# Altium PCB CoreV1.1_test.PcbDoc (part 14 of 14)
Units mil, origin at the board's own origin, x right, y up, seen from the top; angles counter-clockwise.
Board outline 2860 x 2420 mil, 6 copper layers (Top Layer, GND, SIGNAL_1, SIGNAL_2, POWER, Bottom Layer); 110 components, 241 nets, 882 pads, 697 vias.
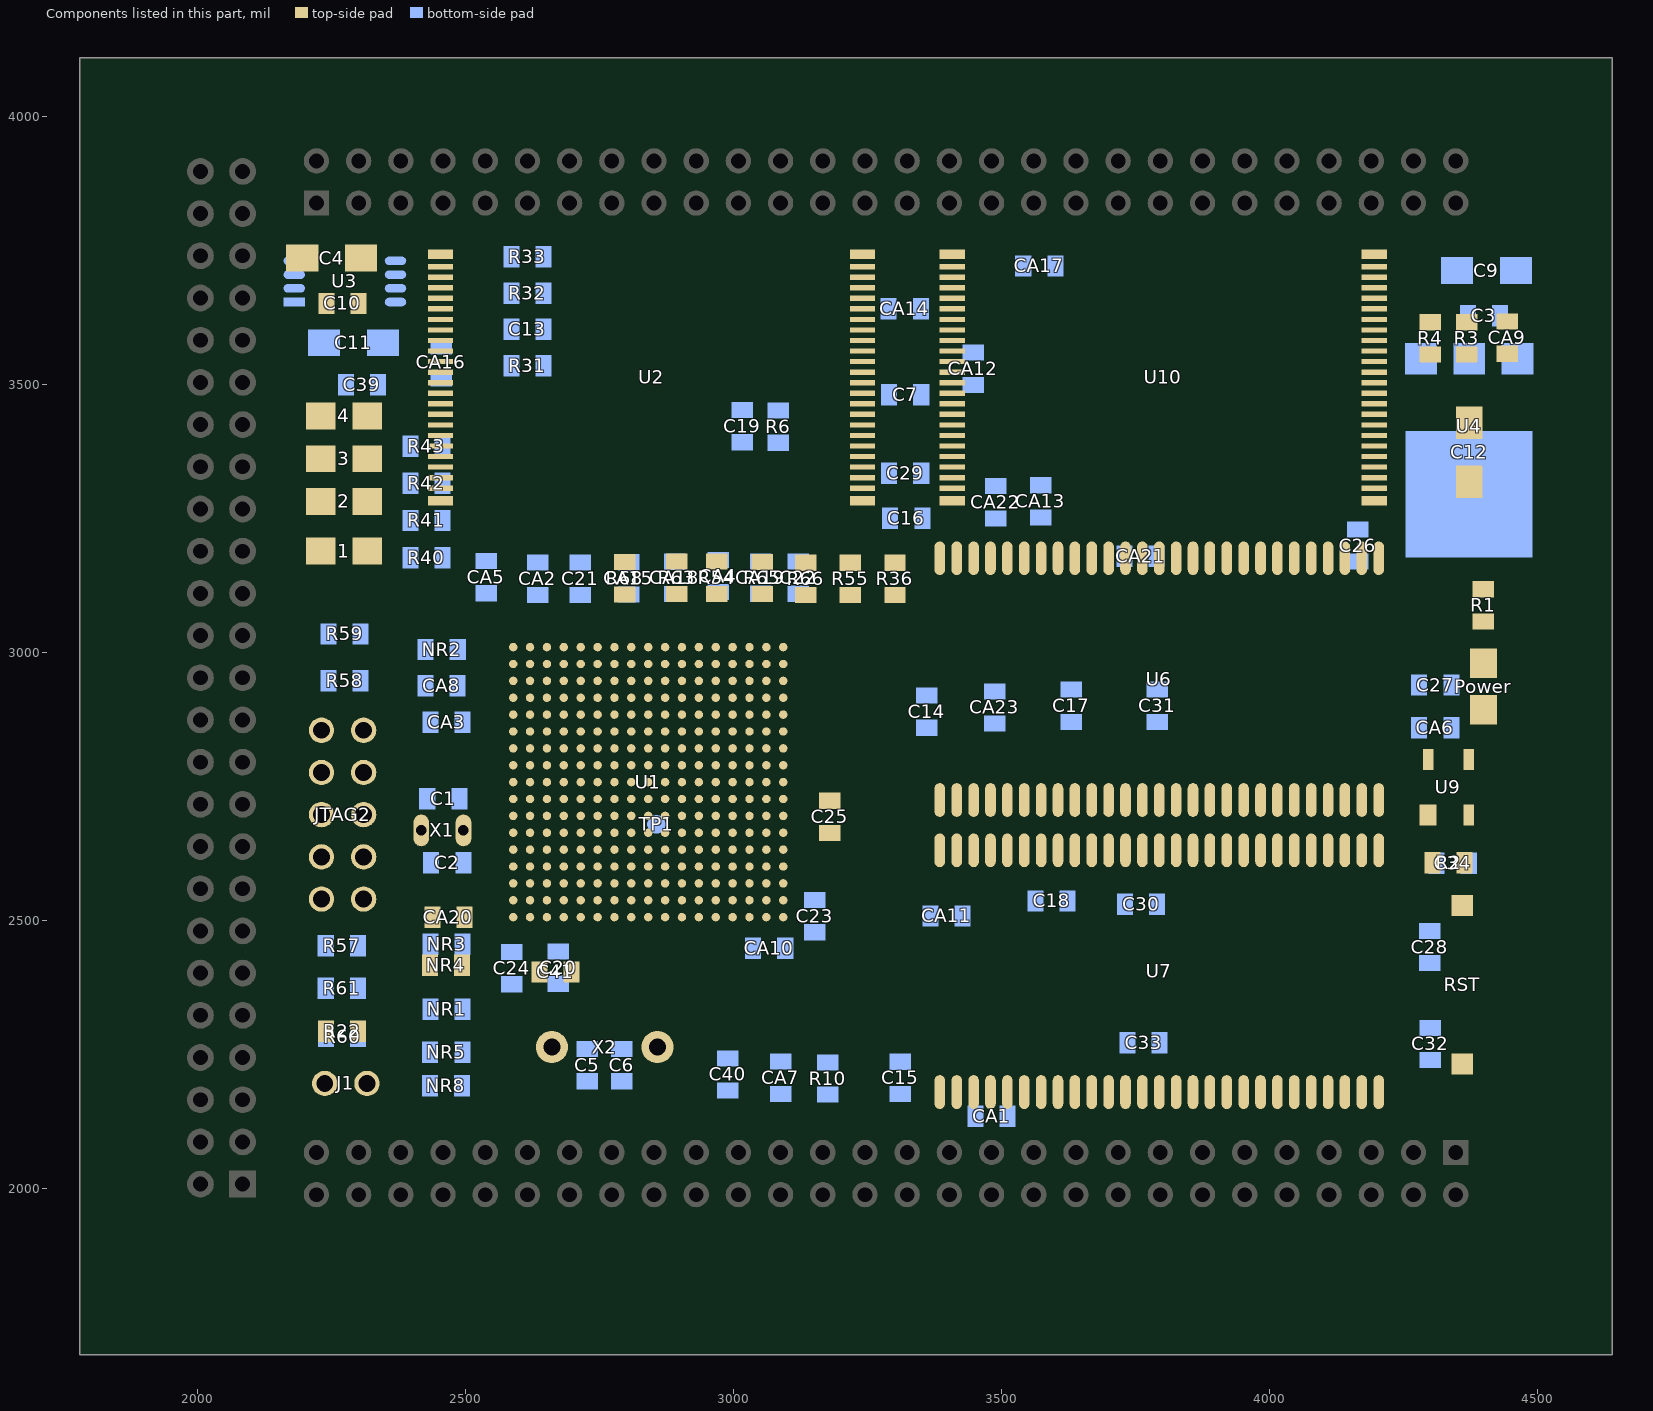
[diagram p18: the components of this part, seen from the top]

## Silkscreen, mask and mechanical layers (free items; w line width, h text height)
Top Overlay:
  lines w5: 2424.75,3297 2484.92,3297 ; 2424.75,3317 2484.92,3317 ; 2424.75,3336 2484.92,3336 ; 2424.75,3356 2484.92,3356 ; 2424.75,3375.5 2484.92,3375.5 ; 2424.75,3394.5 2484.92,3394.5 ; 2424.75,3414.5 2484.92,3414.5 ; 2424.75,3434.5 2484.92,3434.5 ; 2424.75,3453.5 2484.92,3453.5 ; 2424.75,3473.5 2484.92,3473.5 ; 2424.75,3493.5 2484.92,3493.5 ; 2424.75,3512.5 2484.92,3512.5 ; 2425.25,3757 2485.42,3757 ; 2425.75,3533 2485.92,3533 ; 2425.75,3553 2485.92,3553 ; 2425.75,3572 2485.92,3572 ; 2425.75,3592 2485.92,3592 ; 2425.75,3611.5 2485.92,3611.5 ; 2425.75,3630.5 2485.92,3630.5 ; 2425.75,3650.5 2485.92,3650.5 ; 2425.75,3670.5 2485.92,3670.5 ; 2425.75,3689.5 2485.92,3689.5 ; 2425.75,3709.5 2485.92,3709.5 ; 2425.75,3729.5 2485.92,3729.5 ; 3208.33,3278.5 3268.5,3278.5 ; 3208.33,3297.5 3268.5,3297.5 ; 3208.33,3317.5 3268.5,3317.5 ; 3208.33,3337.5 3268.5,3337.5 ; 3208.33,3356.5 3268.5,3356.5 ; 3208.33,3376.5 3268.5,3376.5 ; 3208.33,3396.5 3268.5,3396.5 ; 3208.33,3415.5 3268.5,3415.5 ; 3208.33,3435 3268.5,3435 ; 3208.33,3455 3268.5,3455 ; 3208.33,3474 3268.5,3474 ; 3208.33,3494 3268.5,3494 ; 3209.33,3514.5 3269.5,3514.5 ; 3209.33,3533.5 3269.5,3533.5 ; 3209.33,3553.5 3269.5,3553.5 ; 3209.33,3573.5 3269.5,3573.5 ; 3209.33,3592.5 3269.5,3592.5 ; 3209.33,3612.5 3269.5,3612.5 ; 3209.33,3632.5 3269.5,3632.5 ; 3209.33,3651.5 3269.5,3651.5 ; 3209.33,3671 3269.5,3671 ; 3209.33,3691 3269.5,3691 ; 3209.33,3710 3269.5,3710 ; 3209.33,3730 3269.5,3730 ; 3372.5,3116.86 3372.5,3212 ; 3378.33,3297.5 3438.5,3297.5 ; 3378.33,3316.5 3438.5,3316.5 ; 3378.33,3336.5 3438.5,3336.5 ; 3378.33,3356.5 3438.5,3356.5 ; 3378.33,3375.5 3438.5,3375.5 ; 3378.33,3395.5 3438.5,3395.5 ; 3378.33,3415.5 3438.5,3415.5 ; 3378.33,3434.5 3438.5,3434.5 ; 3378.33,3454 3438.5,3454 ; 3378.33,3474 3438.5,3474 ; 3378.33,3493 3438.5,3493 ; 3378.33,3513 3438.5,3513 ; 3379.33,3533.5 3439.5,3533.5 ; 3379.33,3552.5 3439.5,3552.5 ; 3379.33,3572.5 3439.5,3572.5 ; 3379.33,3592.5 3439.5,3592.5 ; 3379.33,3611.5 3439.5,3611.5 ; 3379.33,3631.5 3439.5,3631.5 ; 3379.33,3651.5 3439.5,3651.5 ; 3379.33,3670.5 3439.5,3670.5 ; 3379.33,3690 3439.5,3690 ; 3379.33,3710 3439.5,3710 ; 3379.33,3729 3439.5,3729 ; 3379.33,3749 3439.5,3749 ; 4164.33,3316.5 4225.5,3316.5 ; 4164.33,3336.5 4224.5,3336.5 ; 4164.33,3356.5 4224.5,3356.5 ; 4164.33,3375.5 4224.5,3375.5 ; 4164.33,3395.5 4224.5,3395.5 ; 4164.33,3415.5 4224.5,3415.5 ; 4164.33,3434.5 4224.5,3434.5 ; 4164.33,3454.5 4224.5,3454.5 ; 4164.33,3474.5 4224.5,3474.5 ; 4164.33,3493.5 4224.5,3493.5 ; 4164.33,3513.5 4224.5,3513.5 ; 4164.33,3533.5 4224.5,3533.5 ; 4164.33,3552.5 4224.5,3552.5 ; 4164.33,3572.5 4224.5,3572.5 ; 4164.33,3592.5 4224.5,3592.5 ; 4164.33,3611.5 4224.5,3611.5 ; 4164.33,3631.5 4224.5,3631.5 ; 4164.33,3651.5 4224.5,3651.5 ; 4164.33,3670.5 4224.5,3670.5 ; 4164.33,3690 4224.5,3690 ; 4164.33,3710 4224.5,3710 ; 4164.33,3729 4224.5,3729 ; 4164.33,3749 4224.5,3749 ; 4164.83,3296.5 4225,3296.5
  lines w7.87: 1946.2,1929.26 2143.06,1929.26 ; 1946.2,3976.5 2143.06,3976.3 ; 2182.43,1929.26 2182.43,2126.11 ; 2182.43,3779.65 2182.43,3976.5 ; 4387.15,1929.26 4387.15,2126.11 ; 4387.15,3779.65 4387.15,3976.5
  lines w8: 1946.2,1929.26 1946.2,1968.63 ; 1946.2,3937.13 1946.2,3976.5 ; 2064.32,1897.76 2084,1929.26 2103.69,1897.76 ; 2143.06,1929.26 2143.06,1968.63 ; 2143.06,3937.13 2143.06,3976.5 ; 2150.93,3819.02 2182.43,3838.71 2150.93,3858.39 ; 2182.43,1929.26 2221.8,1929.26 ; 2182.43,2126.11 2221.8,2126.11 ; 2182.43,3779.65 2221.8,3779.65 ; 2182.43,3976.5 2221.8,3976.5 ; 4347.78,1929.26 4387.15,1929.26 ; 4347.78,2126.11 4387.15,2126.11 ; 4347.78,3779.65 4387.15,3779.65 ; 4347.78,3976.5 4387.15,3976.5 ; 4418.65,2047.37 4387.15,2067.06 4418.65,2086.74 ; 1926.52,1889.89 1926.52,4015.87 4446.2,4015.87 4446.2,1889.89 1926.52,1889.89
  text "D1" at 3700,3959.5 h40
  text "7" at 3948.5,3960.5 h40
  text "15" at 4243,3959.5 h40
  text "D5" at 3839,3959 h40
  text "11" at 4088.5,3959 h40
  text "CS3" at 2261,3958.5 h40
  text "A8" at 2984,3958 h40
  text "A12" at 3185,3956.5 h40 r90
  text "A14" at 3258,3956 h40 r90
  text "9" at 4020,3956.5 h40
  text "WE" at 2433,3953.5 h40
  text "A4" at 2828,3954 h40
  text "A16" at 3339.5,3953.5 h40 r90
  text "A18" at 3418.5,3953.5 h40 r90
  text "A22" at 3573,3954 h40 r90
  text "A24" at 3654,3953 h40 r90
  text "E9" at 2241,3952.5 h40 r90
  text "A2" at 2738.5,3951 h40
  text "A20" at 3495.5,3947 h40 r90
  text "GND" at 4408,3905 h40
  text "E7" at 2128.5,3860 h40
  text "5V" at 4410.5,3827.5 h40
  text "A0" at 2661,3768.21 h40
  text "OE" at 2508.5,3765.5 h40
  text "A1" at 2747.5,3766 h40
  text "D0" at 3686,3765 h40
  text "4" at 3859,3764.5 h40
  text "6" at 3937,3762.5 h40
  text "8" at 4020.5,3762.5 h40
  text "LED" at 2222,3101.5 h40
  text "19" at 4249.5,2101 h40
  text "1" at 3711,2099.5 h40
  text "3" at 3783,2098 h40
  text "17" at 4173.5,2097 h40
  text "5" at 3861.5,2096.5 h40
  text "8" at 3942.5,2096.5 h40
  text "13" at 4007.5,2096.5 h40
  text "15" at 4096.5,2096 h40
  text "5V" at 4394.5,2092.5 h40
  text "GND" at 4393,1967.5 h40
  text "18" at 4249.5,1917.19 h40
  text "14" at 4083.5,1914 h40
  text "4" at 3860,1907 h40
  text "E2" at 3768.5,1905.5 h40
  text "11" at 4008,1906.5 h40
  text "E0" at 3681.5,1904.5 h40
  text "6" at 3936.5,1904 h40
  text "16" at 4164.5,1903.5 h40
Bottom Overlay:
  lines w10: 2152.5,3692 2208,3692 ; 2152.5,3719 2208,3719 ; 2153,3667 2208.5,3667 ; 2341.5,3690 2397,3690 ; 2341.5,3717 2397,3717 ; 2342,3665 2397.5,3665
Top Solder:
  rectangle: 4536,1750 4602,4040
  rectangle: 1850,1750 1910,3980
  region: 4578.5,3980 4578.5,4040 1850,4040 1850,3980
  region: 1910,1810 1910,1750 4600,1750 4600,1810